# Altium PCB novena_battery_evt1a.PcbDoc (part 2 of 3)
Units mil, origin at the board's own origin, x right, y up, seen from the top; angles counter-clockwise.
Board outline 4763.78 x 1614.17 mil, 4 copper layers (Top Layer, Internal Plane 1, Internal Plane 2, Bottom Layer), stack 65.8 mil thick; 204 components, 130 nets, 1424 pads, 318 vias.
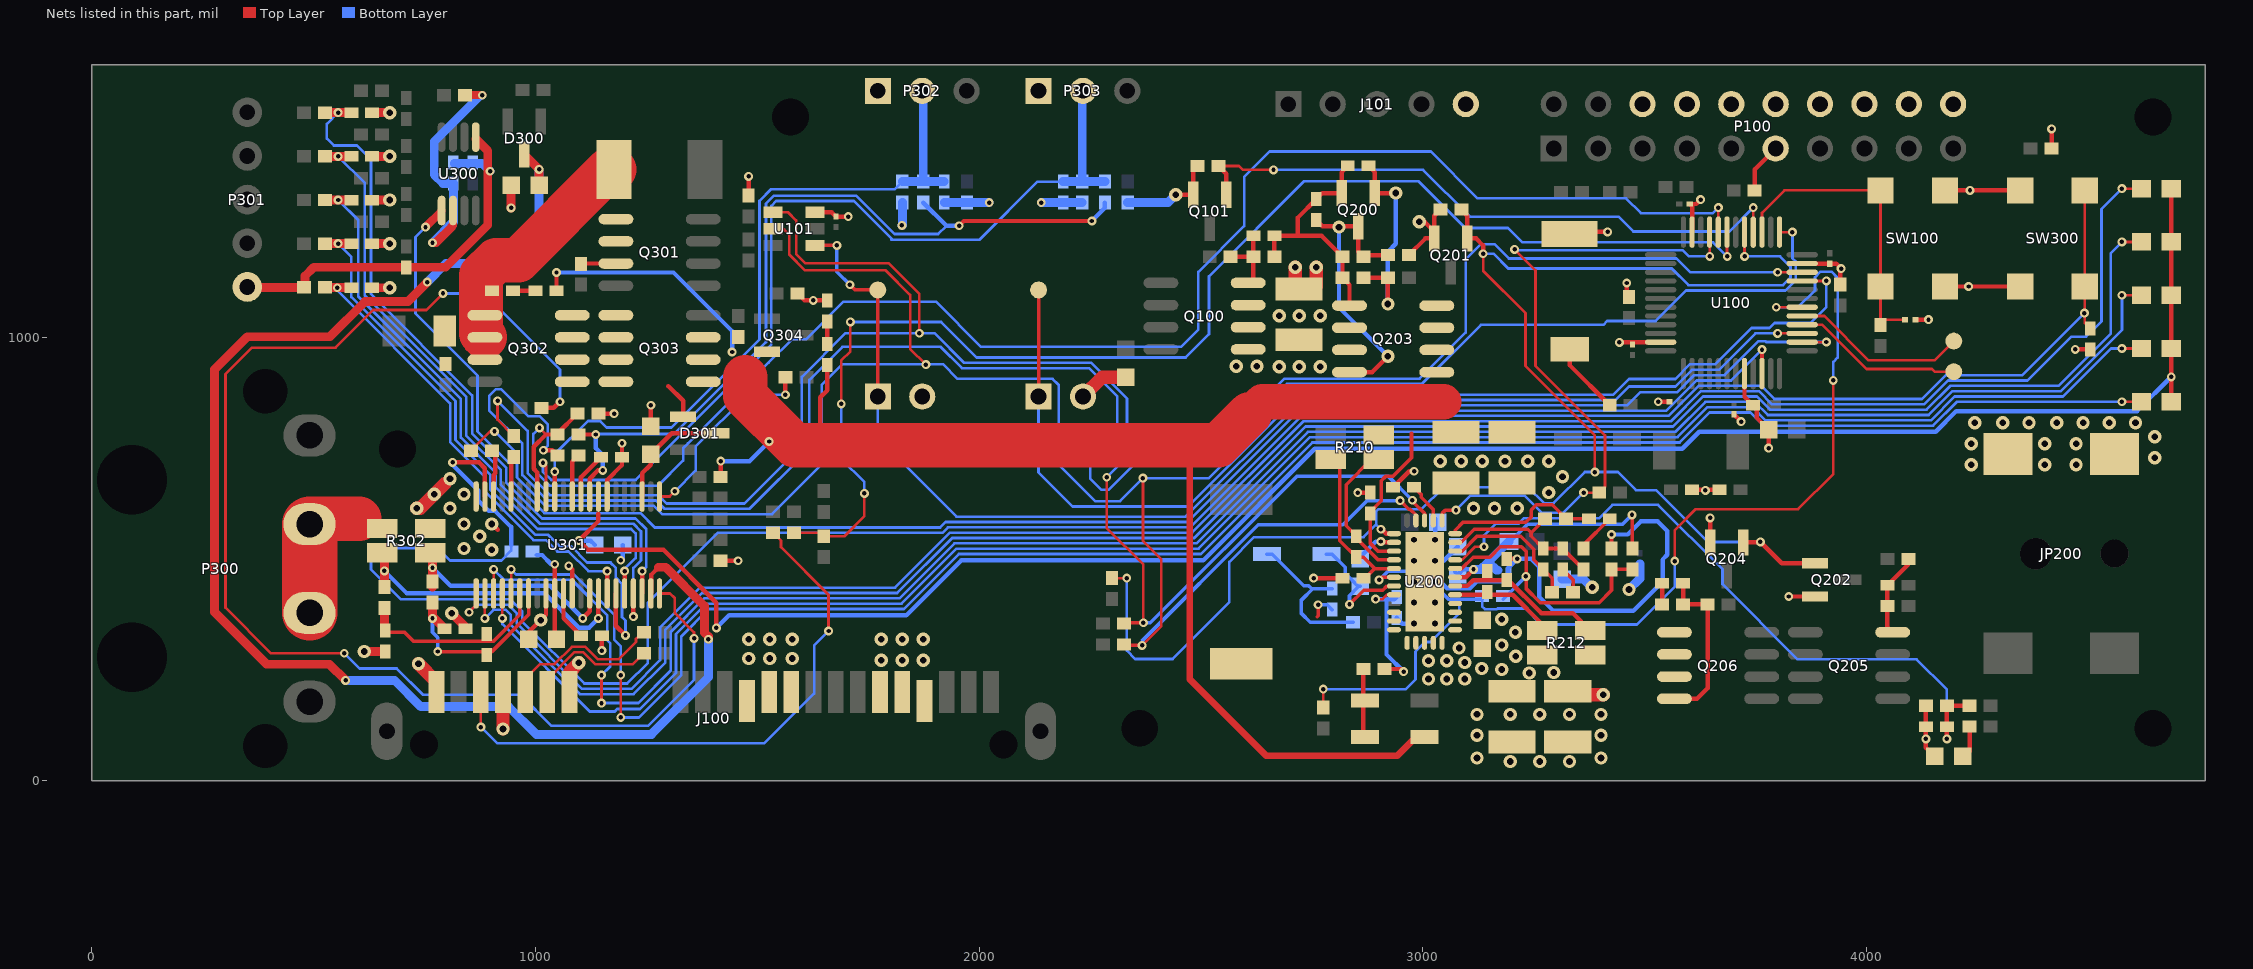
[diagram p4: the nets of this part, all layers, seen from the top]

## Via types
v1: diameter 20, hole 10, Top Layer to Bottom Layer, tented both sides, 179 vias
v2: diameter 30, hole 15, Top Layer to Bottom Layer, tented both sides, 129 vias
v3: diameter 25.98, hole 12.99, Top Layer to Bottom Layer, tented top, 10 vias

## Nets (pads, with @x,y where several pads share a name; then routed paths per layer and width w, separated by ;. In a path a pad name is that pad's centre, name@x,y a point inside that pad or via, vN(x,y) a via of type N, cw(c..) or ccw(c..) an arc to the next point about the centre after c; other vN are vias at no path point)
ADC_IN5: J103.1 P102.1 U100.15 | length 2326
  Top Layer w6: v1(3799.75,1008.41) U100.15@3854.98,1008.41
  Top Layer w8: P102.1@2133.86,866.14 J103.1@2133.86,1106.3
  Bottom Layer w6: P102.1@2133.86,866.14 2133.86,694.88 2210.63,618.11 2470.74,618.11 2711.05,858.42 3434.2,858.42 3464.57,888.78 3569.44,888.78 3606.84,926.18 3667.32,926.18 3749.55,1008.41 v1(3799.75,1008.41)
ADC_IN6: J104.1 U100.16 | length 385.7
  Top Layer w6: U100.16@3854.98,1028.09 3900.06,1028.09 4000,928.15 4147.64,928.15 4153.54,922.24 J104.1@4196.85,922.24
ADC_IN7: J105.1 U100.17 | length 401.2
  Top Layer w6: U100.17@3854.98,1047.78 3904.98,1047.78 4004.92,947.83 4153.54,947.83 J105.1@4196.85,991.14
ANA_METER: J102.1 P101.1 U100.14 U101.1 | length 2981.9
  Top Layer w6: U100.14@3854.98,988.72 v1@3909.32,988.72
  Top Layer w8: U101.1@1629.92,1206.69 v1(1679.13,1206.69) ; v1(1708.66,1118.11) 1720.47,1106.3 J102.1@1771.65,1106.3 P101.1@1771.65,866.14
  Bottom Layer w6: P101.1@1771.65,866.14 1771.65,772.64 1949.01,595.28 2464.89,595.28 2716.02,846.42 3460.59,846.42 3489.75,875.58 3573.21,875.58 3611.77,914.14 3679.91,914.14 3756.56,990.79 3772.3,990.79 3774.03,989.06 v1(3909.65,989.06)
  Bottom Layer w8: v1(1679.13,1206.69) 1679.13,1147.64 v1(1708.66,1118.11)
BAL_SGND: C309.2 C310.2 C311.2 P301.5 R317.1 U300.5 | length 906.7
  Top Layer w20: P301.5@350.39,1113.19 351.38,1112.2 R317.1@478.35,1112.2 480.32,1114.17 480.32,1137.8 500,1157.48 C311.2@708.66,1157.48 796.97,1157.48 892.3,1252.81 892.3,1419.87 U300.5@865.98,1446.19
  Bottom Layer w20: C310.2@816.93,1391.73 866.14,1391.73 879.92,1391.73 v1(897.64,1374.02)
BAT_PGND: P300.2 P300.3 R302.2 | length 316.9
  Top Layer w100: P300.2@490.55,578.35 502.76,590.55 602.36,590.55
  Top Layer w125: P300.3@490.55,378.35 P300.2@490.55,578.35
BAT_PROTECTED: C207.1 C208.1 C223.2 C301.1 C302.2 D200.1 Q203.5 Q203.6 Q203.7 Q203.8 Q303.1 Q303.2 Q303.3 Q304.2 R210.3 R304.2 R319.1 U200.20 | length 4101
  Top Layer w8: U200.20@2935.04,517.72 2898.87,517.72 2881.89,534.7 C223.2@2881.89,602.36 2881.89,606.3 2906.5,630.91 2906.5,676.54 2915.98,686.02 2932.45,686.02 2974.41,727.98 2974.41,783.46
  Top Layer w10: C301.1@1047.24,1104.33 v1(1047.24,1145.67) ; R319.1@1417.32,685.04 v1(1417.32,720.47) ; 1641.73,755.91 1641.73,864.17 1657.48,879.92 C302.2@1657.48,937.01
  Top Layer w15: 2487.2,755.91 2474.41,743.11 2474.41,229.33 2647.64,56.1 2941.93,56.1 2984.25,98.43 D200.1@3003.94,98.43
  Top Layer w80: 2610.24,826.77 2637.8,854.33 3047.24,854.33
  Top Layer w100: 1472.44,909.45 1472.44,867.29 1583.83,755.91 1641.73,755.91 2487.2,755.91 2539.37,755.91 2610.24,826.77
  Bottom Layer w10: v1(1047.24,1145.67) 1311.02,1145.67 1442.91,1013.78 v1(1442.91,966.54) ; v1(1417.32,720.47) 1482.28,720.47 v1(1526.57,764.76)
CHG_ACIN: C217.1 R214.2 R215.1 U200.9 | length 1604.2
  Top Layer w6: U200.9@3072.83,498.03 3088.58,498.03 3118.11,527.56 v1(3137.8,527.56)
  Top Layer w10: v1(4181.1,94.49) C217.1@4181.1,122.05 R215.1@4181.1,169.29 R214.2@4232.28,169.29
  Bottom Layer w6: v1(3137.8,527.56) 3137.8,553.15 3164.37,579.72 3215.55,579.72 3227.36,591.54 3396.65,591.54 3427.17,622.05 3530.51,622.05 3675.42,477.14 3675.42,443.14 3844.94,273.62 4113.19,273.62 4181.1,205.71 v1(4181.1,94.49)
CHG_ACOK: Q201.1 Q202.1 Q204.1 R203.2 R222.2 U100.29 U200.18 | length 3851.7
  Top Layer w6: R222.2@2299.21,456.69 v1(2332.68,456.69) ; v1(3135.83,1187.99) 3135.83,1149.61 3231.3,1054.13 3231.3,935.04 3387.8,778.54 v1(3387.8,695.87) ; v1@3725.06,1182.42 U100.29@3725.06,1236.76
  Top Layer w10: v1(2905.51,566.93) 2907.64,566.93 2917.49,557.09 U200.18@2935.04,557.09 ; R203.2@3086.61,1287.4 3100.39,1273.62 Q201.1@3100.39,1222.44 3120.08,1222.44 3135.83,1206.69 v1(3135.83,1187.99) ; Q204.1@3722.44,537.4 3761.81,537.4 3809.06,490.16 Q202.1@3883.86,490.16
  Bottom Layer w6: v1(2332.68,456.69) 2332.68,293.31 2351.38,274.61 2436.02,274.61 2563.98,402.56 2563.98,493.43 2619.76,549.21 2866.14,549.21 2894.69,577.76 ; v1(2905.51,566.93) 2894.69,577.76 ; v1(3135.83,1187.99) 3159.06,1187.99 3192.52,1154.53 3561.02,1154.53 3598.43,1117.13 3812.01,1117.13 3828.74,1133.86 3828.74,1158.46 3805.12,1182.09 v1(3725.39,1182.09) ; v1(3760.83,538.39) 3642.72,538.39 3525.89,655.22 3480.32,655.22 3439.67,695.87 v1(3387.8,695.87) 3365.16,695.87 3294.9,625.61 3273.02,625.61 3237.2,661.42 3046.26,661.42 2997.05,612.2 2899.61,612.2 2894.69,607.28 2894.69,577.76
CHG_ALERT: R326.2 U100.25 | length 4290.1
  Top Layer w6: U100.25@3803.8,1236.76 v1(3833.13,1236.76) v1@3833.66,1236.22
  Top Layer w10: v1(1017.72,745.08) 1037.4,745.08 R326.2@1049.21,733.27
  Bottom Layer w6: v1(1017.72,745.08) 1027.86,755.22 1027.86,803.15 1009.15,821.85 983.27,821.85 922.24,882.87 910.43,882.87 895.37,867.81 895.37,834.94 970.28,760.03 970.28,688.93 1027.32,631.89 1271.65,631.89 1290.4,613.14 1482.34,613.14 1617.13,747.92 1617.13,903.43 1691.85,978.16 1913.34,978.16 1961.34,930.16 2247.75,930.16 2311.02,866.89 2311.02,777.56 2250,716.54 2250,681.1 2275.22,655.88 2291.95,655.88 2353.77,717.71 2516.68,717.71 2693.39,894.42 2997.53,894.42 3130.86,1027.75 3406.69,1027.75 3415.35,1036.42 3524.75,1036.42 3593.45,1105.13 3816.98,1105.13 3840.74,1128.89 3840.74,1170.09 3833.13,1177.7 v1(3833.13,1236.76)
CHG_CE: R220.2 U100.33 U200.13 | length 1556.9
  Top Layer w6: v1(3206.69,1197.83) 3253.94,1150.59 3253.94,935.04 3410.43,778.54 3410.43,662.4 R220.2@3397.64,649.61 v1(3362.2,649.61) ; U100.33@3646.32,1236.76 3646.32,1182.42 v1(3646.65,1182.09)
  Top Layer w8: U200.13@3043.31,586.61 3043.31,602.36 3051.18,610.24 v1(3074.8,610.24)
  Bottom Layer w6: v1(3074.8,610.24) 3107.28,642.72 3229.33,642.72 3267.72,604.33 3316.93,604.33 v1(3362.2,649.61) ; v1@3209.65,1195.87 3585.63,1195.87 3599.41,1182.09 v1(3646.65,1182.09)
CHG_CRIT: U100.10 U300.1 | length 3805.9
  Top Layer w10: v1@3763.78,972.44 v1(3764.43,971.79) U100.10@3764.43,917.86
  Top Layer w18: v1(751.97,1248.03) 788.39,1284.45 U300.1@788.39,1285.43
  Bottom Layer w6: v1(751.97,1248.03) 729.33,1225.39 729.33,1053.15 869.15,913.33 869.15,787.59 945.87,710.87 945.87,677.17 1019.69,603.35 1236.22,603.35 1268.7,570.87 1911.92,570.87 1924.34,583.28 2469.86,583.28 2720.99,834.42 3549.02,834.42 3616.74,902.14 3694.78,902.14 v1(3764.43,971.79)
CHG_CSON: C212.1 R210.4 U200.21 | length 332.5
  Top Layer w8: R210.4@2900.59,724.41 2884.08,724.41 2826.99,667.32 2826.99,574.58 C212.1@2850.39,551.18 2850.39,546.4 2898.76,498.03 U200.21@2935.04,498.03
CHG_CSOP: C212.2 C218.2 R210.1 U200.22 | length 376
  Top Layer w8: R210.1@2792.32,724.41 2812.99,703.74 2812.99,541.34 C212.2@2850.39,503.94 2866.14,503.94 2891.73,478.35 ; C218.2@2866.14,452.76 2891.73,478.35 ; U200.22@2935.04,478.35 2891.73,478.35
CHG_CSSN: C216.2 R212.4 U200.5 | length 237.9
  Top Layer w10: U200.5@3072.83,419.29 3202.76,419.29 3268.7,353.35 R212.4@3268.7,338.58
CHG_CSSP: C216.1 C219.1 R212.1 U200.6 | length 356.5
  Top Layer w10: U200.6@3072.83,438.98 3100.39,438.98 3113.36,451.95 3192.73,451.95 3266.72,377.95 3337.6,377.95 R212.1@3376.97,338.58
CHG_EAI: C220.2 C221.2 R223.1 R224.1 U200.11 | length 389.9
  Top Layer w8: U200.11@3072.83,537.4 3080.71,537.4 3082.68,539.37 3084.65,539.37 3086.61,537.4 3116.14,566.93 3236.22,566.93 3244.09,559.06 ; R223.1@3275.59,590.55 3244.09,559.06 ; R224.1@3362.2,476.38 C220.2@3314.96,523.62 C221.2@3271.65,523.62 3244.09,551.18 3244.09,559.06
CHG_EAO: C221.1 R219.2 U200.10 | length 316.8
  Top Layer w8: U200.10@3072.83,517.72 3088.58,517.72 3122.05,551.18 3220.47,551.18 3249.84,521.81 3249.84,498.19 C221.1@3271.65,476.38 3291.34,456.69 R219.2@3291.34,425.2
CHG_FBO: C225.2 R223.2 U200.12 | length 355
  Top Layer w8: U200.12@3072.83,557.09 3072.83,564.96 3090.55,582.68 3232.28,582.68 3244.09,594.49 3244.09,610.24 3255.91,622.05 3291.34,622.05 R223.2@3322.83,590.55 C225.2@3374.02,590.55
CHG_ICOUT: R216.2 R218.2 U100.18 U200.23 | length 2548.1
  Top Layer w6: R216.2@2775.59,165.35 v1(2775.59,206.69) ; v1(3567.91,495.08) 3567.91,564.96 3615.16,612.2 3845.47,612.2 3925.2,691.93 v1(3925.2,902.56) v1@3924.21,903.54 ; v1@3796.26,1067.91 v1(3796.71,1067.46) U100.18@3854.98,1067.46
  Top Layer w8: v1(2901.57,452.76) 2907.48,458.66 U200.23@2935.04,458.66
  Bottom Layer w6: v1(2775.59,206.69) 2961.61,206.69 2983.27,228.35 2983.27,291.34 3004.92,312.99 3017.32,312.99 3081.69,377.36 3081.69,409.45 ; R218.2@3133.86,416.34 3133.86,409.45 3133.86,392.72 3139.76,386.81 3166.85,386.81 3168.21,388.17 3230.92,388.17 3266.73,352.36 3482.28,352.36 3567.91,437.99 v1(3567.91,495.08) ; v1(3796.71,1067.46) 3846.01,1067.46 3883.86,1105.32 3883.86,1134.84 3896.65,1147.64 3921.26,1147.64 3935.04,1133.86 3935.04,953.74 3925.2,943.9 v1(3925.2,902.56)
  Bottom Layer w8: v1(2901.57,452.76) 2920.63,471.81 2989.84,471.81 3003.31,458.34 3003.31,440.55 3018.04,425.83 3041.34,425.83 3057.72,409.45 3081.69,409.45 R218.2@3133.86,409.45
CHG_ICREF: R217.2 R218.1 R221.1 U200.8 | length 652.5
  Top Layer w8: U200.8@3072.83,478.35 3087.86,478.35 3113.45,503.94 3151.21,503.94 3174.83,527.56 3222.22,527.56 3232.59,517.19 3232.59,433.3 3264.47,401.42 3397.48,401.42 3425.2,429.13 R221.1@3425.2,476.38 R217.2@3472.44,476.38
  Bottom Layer w8: R218.1@3181.1,409.45 v1(3232.28,460.63)
CHG_MASTERPWR: Q101.1 R108.2 U100.28 | length 1416.3
  Top Layer w6: R108.2@2539.37,1385.83 2585.63,1385.83 2594.49,1376.97 v1(2663.39,1376.97) ; U100.28@3744.75,1236.76 v1(3744.75,1291.99)
  Top Layer w10: R108.2@2539.37,1385.83 2557.09,1368.11 Q101.1@2557.09,1320.87
  Bottom Layer w6: v1(2663.39,1376.97) 3000.87,1376.97 3106.19,1271.65 3440.83,1271.65 3474.3,1238.19 3690.95,1238.19 v1(3744.75,1291.99)
CHG_PWRSWITCH: C116.2 R119.1 SW100.1 SW100.2 U100.27 | length 694.6
  Top Layer w6: U100.27@3764.43,1236.76 3764.43,1280.18 3814.96,1330.71 SW100.1@4031.5,1330.71 SW100.2@4031.5,1114.17 R119.1@4031.5,1027.56 4043.31,1039.37 C116.2@4086.61,1039.37
CHG_SCL: R225.2 R329.2 U100.21 U101.5 U200.16 | length 5773.6
  Top Layer w6: R329.2@854.33,744.09 897.64,787.4 v1(907.48,787.4) ; U101.5@1535.43,1244.09 1533.46,1244.09 1532.48,1243.11 1560.04,1243.11 1571.85,1231.3 1571.85,1185.79 1607.05,1150.59 1789.37,1150.59 1844.49,1095.47 1844.49,973.43 v1(1879.92,937.99) ; v1(2367.13,305.12) 2410.43,348.43 2410.43,499.02 2369.09,540.35 v1(2369.09,682.09) ; U100.21@3854.98,1126.52 v1@3909.32,1126.52
  Top Layer w8: R225.2@2326.77,307.09 2328.74,305.12 v1(2367.13,305.12) ; v1@2948.82,633.86 v1(2948.82,631.64) 2968.09,612.36 2971.16,612.36 2984.25,599.27 U200.16@2984.25,586.61
  Bottom Layer w6: v1(907.48,787.4) 907.48,788.39 958.28,737.58 958.28,683.96 1022.35,619.89 1266.68,619.89 1285.43,601.14 1533.12,601.14 1644.89,712.91 1644.89,891.93 1691.93,938.98 1918.58,938.98 1951.4,906.16 2165.63,906.16 2179.13,892.65 2179.13,712.6 2261.32,630.41 2317.42,630.41 v1(2369.09,682.09) 2517.75,682.09 2706.08,870.42 3429.23,870.42 3464.57,905.75 3569.44,905.75 3602.66,938.98 3659.45,938.98 3741.14,1020.67 3781.5,1020.67 3792.82,1031.99 3873.52,1031.99 3909.65,1068.12 v1(3909.65,1126.85)
  Bottom Layer w8: v1@2367.13,302.17 v1(2367.13,305.12) 2367.13,314.96 2628.94,576.77 2819.88,576.77 2874.75,631.64 v1(2948.82,631.64)
CHG_SDA: R226.2 R327.2 U100.22 U101.4 U200.15 | length 5782.3
  Top Layer w6: v1(914.37,856.3) 914.37,813.98 R327.2@950.79,777.56 ; U101.4@1535.43,1281.5 1568.9,1281.5 1587.6,1262.8 1587.6,1187.01 1608.27,1166.34 1796.26,1166.34 1865.16,1097.44 v1(1865.16,1008.86) ; v1(2287.4,684.06) 2287.4,569.88 2370.08,487.2 v1(2370.08,356.3) ; v1(3799.75,1146.2) U100.22@3854.98,1146.2
  Top Layer w8: R226.2@2326.77,354.33 2328.74,356.3 v1(2370.08,356.3) ; v1(2976.38,632.36) 2976.38,629.92 3003.94,602.36 U200.15@3003.94,586.61
  Bottom Layer w6: v1(914.37,856.3) 982.28,788.39 982.28,693.9 1032.29,643.89 1276.62,643.89 1295.37,625.14 1470.61,625.14 1600.34,754.87 1600.34,910.38 1698.82,1008.86 1899.61,1008.86 1966.31,942.16 2252.72,942.16 2333.06,861.83 2333.06,729.71 ; v1(2287.4,684.06) 2333.06,729.71 ; v1(3799.75,1146.2) 3602.81,1146.2 3571.85,1177.17 3193.9,1177.17 3161.42,1209.65 3130.61,1209.65 3096.46,1175.49 3096.46,1010.32 2992.56,906.42 2688.42,906.42 2511.71,729.71 2333.06,729.71
  Bottom Layer w8: v1(2370.08,356.3) 2385.83,356.3 2715.55,686.02 2922.72,686.02 v1(2976.38,632.36)
CHG_SYS: C100.1 C200.2 C201.1 C202.1 C209.1 C210.1 C211.1 Q100.1 Q100.2 Q100.3 Q200.2 Q203.1 Q203.2 Q203.3 R104.2 R200.1 R204.1 R212.3 U200.2 U200.3 U200.4 | length 649.2
  Top Layer w10: R104.2@2665.35,1181.1 C100.1@2665.35,1228.35 2718.5,1228.35 ; C200.2@2830.71,1385.83 2816.93,1372.05 Q200.2@2816.93,1324.8 2773.62,1324.8 C202.1@2759.84,1311.02 2718.5,1269.69 2718.5,1228.35 ; Q203.1@2834.65,1071.06 2834.65,1118.11 R200.1@2818.9,1133.86 R204.1@2818.9,1181.1 2771.65,1228.35 2718.5,1228.35
  Top Layer w30: C210.1@3326.77,201.77 3334.65,193.9 v2(3406.5,193.9)
  other v2: 3240.16,243.11 3295.28,244.09 3178.15,250.98 3209.65,280.51 3178.15,306.1 3208.66,334.65 3178.15,364.17 2676.18,933.07 2721.46,933.07 2768.7,933.07 2579.72,934.06 2625.98,934.06 2676.18,1048.23 2721.46,1048.23 2768.7,1048.23
CHG_VREF: C105.1 C214.1 L100.1 R217.1 U200.7 | length 603.3
  Top Layer w8: R217.1@3472.44,523.62 3472.44,562.99 v1@3472.44,599.41
  Top Layer w10: U200.7@3072.83,458.66 3096.46,458.66 v1(3114.17,476.38)
  Bottom Layer w8: C214.1@3071.5,471.81 C214.1@3078.74,464.57 ; L100.1@3201.4,543.86 3235.29,577.76 3449.8,577.76 v1(3471.46,599.41)
  Bottom Layer w10: C214.1@3078.74,464.57 3090.55,476.38 v1(3114.17,476.38)
  Bottom Layer w20: v1(3114.17,476.38) 3130.91,476.38 3147.64,493.11 ; C105.1@3169.29,474.41 3166.34,474.41 3147.64,493.11 ; L100.1@3193.9,539.37 3147.64,493.11
GG_2.5V: C321.1 R334.2 U301.32 | length 219.8
  Top Layer w10: v1(1043.31,488.19) U301.32@1043.31,422.24 1043.31,322.83 C321.1@1047.24,318.9
  Bottom Layer w10: R334.2@1002.95,508.86 1014.76,508.86 1035.43,488.19 v1(1043.31,488.19)
GG_3.3V: C323.1 D302.1 D303.1 D304.1 D305.1 D306.1 U301.8 | length 4539.1
  Top Layer w10: 1141.73,602.36 1141.73,585.63 v1(1097.44,541.34) 1118.11,520.67 1288.39,520.67 1407.55,401.51 v1(1407.55,344.51) ; D302.1@4687.01,854.33 D303.1@4687.01,974.41 D304.1@4687.01,1094.49 D305.1@4687.01,1214.57 D306.1@4687.01,1334.65
  Bottom Layer w10: v1(1097.44,541.34) 1124.02,541.34 C323.1@1133.86,531.5 ; v1(1407.55,344.51) 1436.27,373.23 1835.91,373.23 1959.96,497.28 2505.48,497.28 2756.61,748.42 3584.64,748.42 3622.83,786.61 4155.79,786.61 4202.51,833.33 4609.91,833.33 v1(4687.01,910.43)
GG_ALERT: R326.1 U301.11 | length 98.2
  Top Layer w10: U301.11@1082.68,640.75 1082.68,719.49 R326.1@1096.46,733.27
GG_ASRN: R302.4 R325.2 U301.36 | length 527.3
  Top Layer w10: v1(1106.3,366.14) 1122.05,381.89 U301.36@1122.05,422.24
  Top Layer w20: R302.4@762.8,513.78 767.72,508.86 R325.2@767.72,448.82 R325.2@767.72,437.01
  Bottom Layer w10: v1(767.72,480.32) 808.89,439.14 1033.3,439.14 v1(1106.3,366.14)
GG_ASRP: R302.1 R328.2 U301.37 | length 678.8
  Top Layer w10: v1(1141.73,366.14) U301.37@1141.73,422.24
  Top Layer w20: R302.1@654.53,513.78 659.45,508.86 v1(659.45,472.93) R328.2@659.45,437.01
  Bottom Layer w10: v1(659.45,472.93) 709.24,423.14 1019.6,423.14 1097.6,345.14 1120.73,345.14 v1(1141.73,366.14)
GG_CHG: R307.2 U301.44 | length 2997.9
  Top Layer w6: v1(568.9,287.4) 403.89,287.4 301.18,390.11 301.18,916.97 360.59,976.38 549.21,976.38 634.06,1061.22 754.13,1061.22 v1(791.34,1098.43) ; U301.44@1279.53,422.24 1303.15,422.24 1313.98,411.42 1313.98,377.95 1357.28,334.65 v1(1357.28,320.87)
  Top Layer w10: R307.2@1013.78,840.55 1041.34,840.55 v1(1055.12,854.33)
  Bottom Layer w6: v1(568.9,287.4) 603.35,252.95 687.01,252.95 746.06,193.9 965.55,193.9 1035.73,123.72 1253.34,123.72 1357.28,227.66 v1(1357.28,320.87) ; v1@790.35,1098.43 v1(791.34,1098.43) 883.86,1098.43 1055.12,927.17 v1(1055.12,854.33)
GG_DISP: C326.1 R334.1 SW300.3 SW300.4 U301.21 | length 5524.7
  Top Layer w6: SW300.3@4492.13,1330.71 SW300.4@4492.13,1114.17 4492.13,1031.5 C326.1@4503.94,1019.69
  Top Layer w10: v1(813.03,717.55) 873,717.55 885.83,704.72 U301.21@885.83,640.75
  Bottom Layer w6: 944.88,531.5 944.88,518.7 922.85,496.67 807.46,496.67 779.53,524.61 648.62,524.61 629.13,505.12 629.13,476.38 696.37,409.14 943.01,409.14 969.78,382.37 969.78,359.54 1110.13,219.19 1206.39,219.19 1252.95,265.75 1252.95,401.39 1410.43,558.87 1916.9,558.87 1929.31,571.28 2474.83,571.28 2725.96,822.42 3553.99,822.42 3621.71,890.14 3762.89,890.14 3792.42,860.61 4125.14,860.61 4178.86,914.33 4351.34,914.33 v1(4491.14,1054.13)
  Bottom Layer w10: v1(813.03,717.55) 813.03,712.56 871.06,654.53 871.06,631.89 894.69,608.27 908.82,608.27 944.88,572.2 944.88,531.5
GG_DSG: R308.2 U301.1 | length 449.5
  Top Layer w6: U301.1@1279.53,640.75 1302.17,640.75 v1(1313.98,652.56)
  Top Layer w10: v1(1562.99,870.08) R308.2@1562.99,909.45
  Bottom Layer w6: v1(1313.98,652.56) 1360.73,699.31 1360.73,753.44 1477.36,870.08 v1(1562.99,870.08)
GG_GSRN: C317.1 C318.1 R325.1 U301.29 | length 441.4
  Top Layer w8: v1(779.53,291.34) 901.69,291.34 984.25,373.9 U301.29@984.25,422.24
  Top Layer w20: v1(767.72,366.14) v1@771.65,366.14 ; R325.1@767.72,401.57 767.72,370.08 v1@771.65,366.14 ; C318.1@795.28,342.52 v1@771.65,366.14
  Bottom Layer w8: v1(767.72,366.14) 767.72,334.65 779.53,322.83 v1(779.53,291.34)
GG_GSRP: C317.2 C319.1 R328.1 U301.28 | length 441.1
  Top Layer w8: C319.1@659.45,334.65 704.72,334.65 724.41,314.96 905.51,314.96 964.57,374.02 U301.28@964.57,422.24
  Top Layer w20: C319.1@659.45,334.65 R328.1@659.45,389.76
GG_P1: C312.1 R313.2 U301.42 | length 1601.5
  Top Layer w10: U301.42@1240.16,422.24 v1(1240.16,472.44)
  Top Layer w20: R313.2@525.59,1505.91 v1(555.12,1505.91) C312.1@576.77,1505.91
  Bottom Layer w6: v1(555.12,1505.91) 529.53,1480.32 529.53,1447.83 545.28,1432.09 597.44,1432.09 628.94,1400.59 628.94,1097.17 857.15,868.96 857.15,782.61 933.87,705.9 933.87,672.19 1014.71,591.35 1225.37,591.35 1249.54,567.18 1249.54,481.82 v1(1240.16,472.44)
GG_P2: C315.1 R314.2 U301.41 | length 1553.9
  Top Layer w10: v1(1220.47,370.08) U301.41@1220.47,422.24
  Top Layer w20: R314.2@525.59,1407.48 v1(555.12,1407.48) C315.1@576.77,1407.48
  Bottom Layer w6: v1(555.12,1407.48) 615.16,1347.44 615.16,1093.98 843.46,865.68 843.46,778.59 921.87,700.18 921.87,667.22 1009.74,579.35 1220.4,579.35 1237.54,562.21 1237.54,496.69 1220.47,479.63 v1(1220.47,370.08)
GG_P3: C313.1 R315.2 U301.40 | length 1349.6
  Top Layer w10: U301.40@1200.79,422.24 v1(1200.79,472.44)
  Top Layer w20: R315.2@525.59,1309.06 v1(555.12,1309.06) C313.1@576.77,1309.06
  Bottom Layer w6: v1(555.12,1309.06) 600.39,1263.78 600.39,1091.77 831.46,860.71 831.46,773.39 909.87,694.98 909.87,661.75 1004.27,567.35 1215.43,567.35 1225.54,557.24 1225.54,501.66 1200.79,476.91 v1(1200.79,472.44)
GG_P4: C316.1 R316.2 U301.39 | length 1368.3
  Top Layer w10: U301.39@1181.1,422.24 1181.1,349.41 v1(1202.76,327.76)
  Top Layer w20: R316.2@525.59,1210.63 v1(555.12,1210.63) C316.1@576.77,1210.63
  Bottom Layer w6: v1(555.12,1210.63) 584.65,1181.1 584.65,1090.55 819.46,855.74 819.46,768.42 897.87,690.01 897.87,656.78 1000.38,554.26 1028.65,554.26 1054.18,528.73 1079.77,528.73 1116.38,492.13 1169.29,492.13 1169.29,491.44 1181.1,479.63 1181.1,457.68 1194.73,444.05 1194.73,368.95 1202.76,360.93 v1(1202.76,327.76)
GG_P5: C314.1 R317.2 U301.38 | length 1048.5
  Top Layer w10: U301.38@1161.42,422.24 v1(1161.42,472.44)
  Top Layer w20: R317.2@525.59,1112.2 C314.1@576.77,1112.2
  Bottom Layer w6: v1(553.15,1111.22) 553.15,1105.08 807.46,850.77 807.46,763.45 885.87,685.04 885.87,651.8 995.41,542.26 1023.68,542.26 1049.21,516.73 1074.8,516.73 1119.09,472.44 v1(1161.42,472.44)
GG_SMBC: R329.1 U301.20 | length 108.2
  Top Layer w10: R329.1@901.57,744.09 909.45,736.22 909.45,692.91 905.51,688.98 U301.20@905.51,640.75
GG_SMBD: R327.1 U301.18 | length 95.5
  Top Layer w10: U301.18@944.88,640.75 R327.1@944.88,736.22
GG_SYSPRES: R324.2 R330.1 U100.32 U301.15 | length 3725
  Top Layer w6: v1(1008.86,795.28) 1008.86,795.1 1023.45,780.51 ; U100.32@3666.01,1236.76 v1(3666.01,1291.99) v1@3666.34,1292.32
  Top Layer w10: U301.15@1003.94,640.75 1003.94,694.88 995.78,703.04 995.78,752.84 1023.45,780.51 R324.2@1049.21,780.51 1049.21,782.48 R330.1@1094.49,827.76
  Bottom Layer w6: v1(1008.86,795.28) 995.08,781.5 995.08,701.24 1030.96,665.35 1276.57,665.35 1332.68,721.46 1332.68,749.55 1343.24,760.11 1525.42,942.29 1578.2,995.08 1609.49,995.08 1694.32,1079.91 1902.37,1079.91 2004.13,978.16 2455.28,978.16 2493.91,1016.78 2493.91,1146.94 2597.25,1250.29 2597.25,1361.27 2654.29,1418.31 3018,1418.31 3123.31,1312.99 3457.96,1312.99 3491.42,1279.53 3653.54,1279.53 v1(3666.01,1291.99)
GG_TOUT: R324.1 R331.2 R332.2 U301.9 | length 1903.3
  Top Layer w10: R324.1@1096.46,780.51 v1(1135.83,780.51) ; U301.9@1122.05,640.75 1122.05,681.1 1140.75,699.8 v1(1151.57,699.8) ; v1(1954.72,1250.98) 1965.55,1261.81 v1(2253.94,1261.81)
  Bottom Layer w6: v1@1135.83,781.5 1312.22,781.5 1519.5,988.77 1519.5,1300.99 1537.4,1318.9 1722.44,1318.9 1809.06,1232.28 1907.48,1232.28 1926.18,1250.98
  Bottom Layer w10: v1(1135.83,780.51) 1135.83,750 1151.57,734.25 v1(1151.57,699.8) ; R331.2@1874.02,1303.15 1926.18,1250.98 v1(1954.72,1250.98) ; v1(2253.94,1261.81) 2283.46,1291.34 R332.2@2283.46,1303.15
GG_TS1: C325.1 P302.2 R331.1 R335.2 U301.13 | length 1628.7
  Top Layer w10: U301.13@1043.31,640.75 v1(1043.31,696.85)
  Bottom Layer w6: v1(1043.31,696.85) 1043.31,736.22 1118.11,811.02 1145.67,811.02 1160.43,796.26 1171.26,796.26 1306.1,796.26 1504.73,994.89 1504.73,1307.11 1531.29,1333.66 1810.04,1333.66 R335.2@1826.77,1350.39
  Bottom Layer w20: R335.2@1826.77,1350.39 R331.1@1874.02,1350.39 ; P302.2@1871.65,1555.12 1874.02,1552.76 R331.1@1874.02,1350.39 ; C325.1@1921.26,1350.39 R331.1@1874.02,1350.39
GG_TS2: C324.1 P303.2 R332.1 R333.2 U301.14 | length 2114
  Top Layer w6: v1(1016.78,716.57) 1023.62,709.73 U301.14@1023.62,640.75
  Bottom Layer w6: v1(1016.78,716.57) 1016.78,696.51 1035.44,677.85 1225.54,677.85 1325.52,777.83 1531.5,983.8 1531.5,1296.02 1542.37,1306.9 1717.47,1306.9 1802.17,1222.2 1802.17,1219.49 2000.98,1219.49 2131.89,1350.39 C324.1@2188.98,1350.39
  Bottom Layer w20: C324.1@2188.98,1350.39 R332.1@2283.46,1350.39 ; R333.2@2232.28,1350.39 2232.28,1553.54 P303.2@2233.86,1555.12
GG_VCC: C307.1 D301.3 U301.3 | length 270.8
  Top Layer w10: U301.3@1240.16,640.75 1240.16,692.91 1259.84,712.6 C307.1@1259.84,736.22 1307.09,783.46 D301.3@1407.48,783.46
GND: C101.2 C102.2 C103.2 C104.2 C105.2 C106.2 C107.2 C108.2 C109.2 C110.2 C111.2 C112.1 C113.1 C114.2 C115.2 C116.1 C201.2 C203.2 C207.2 C208.2 C209.2 C210.2 C211.2 C213.2 C214.2 C215.2 C217.2 C218.1 C219.2 C222.2 C223.1 C224.2 C303.2 C305.1 C307.2 C312.2 C313.2 C314.2 C315.2 C316.2 C318.2 C319.2 C320.2 C321.2 C322.2 C323.2 C324.2 C325.2 C326.2 J100.4 J100.5 J100.6 J100.10 J100.11 J100.12 J100.16 J100.19 J100.22 J101.5 JP200.2 JP200.3 P100.6 P100.8 P100.10 P100.11 P100.12 P100.14 P100.16 P100.18 P100.20 P101.2 P102.2 P302.1 P303.1 Q101.2 Q201.2 Q202.2 Q204.2 R106.1 R108.1 R114.1 R115.1 R116.1 R118.2 R202.2 R203.1 R215.2 R221.2 R302.3 R311.2 R323.2 R330.2 R333.1 R335.1 R336.1 R337.1 SW100.3 SW100.4 SW300.1 SW300.2 U100.8 U100.23 U100.35 U100.47 U101.3 U200.1 U200.19 U200.32 U200.33 U200.34 U200.35 U301.7 U301.22 U301.31 U301.34 | length 5385.5
  Top Layer w10: v2(901.57,578.74) 914.7,565.61 ; C321.2@984.25,318.9 984.25,334.65 1023.62,374.02 U301.31@1023.62,422.24 ; v1(1074.8,484.25) 1082.68,476.38 U301.34@1082.68,422.24 ; R330.2@1141.73,827.76 v1(1177.17,827.76) ; v1(1149.61,293.31) C322.2@1149.61,326.77 ; U301.7@1161.42,640.75 1161.42,678.15 1194.88,711.61 C320.2@1194.88,729.33 v1(1194.88,760.83) ; C307.2@1259.84,799.21 v1(1259.84,846.46) ; R323.2@1417.32,496.06 v1(1456.69,496.06) ; R118.2@1480.31,1318.9 v1(1480.31,1362.2) ; R311.2@1590.55,1098.43 1606.3,1082.68 C305.1@1657.48,1082.68 ; U101.3@1629.92,1281.5 1667.32,1281.5 C115.2@1677.17,1271.65 v1(1704.72,1271.65) ; v2@2440.94,1322.83 v2(2442.91,1320.87) Q101.2@2482.28,1320.87 2482.28,1375.98 R108.1@2492.13,1385.83 ; v1(2753.94,456.69) C218.1@2818.9,456.69 ; v1(2853.35,649.61) C223.1@2881.89,649.61 ; v1(2905.51,539.37) 2907.47,537.4 U200.19@2935.04,537.4 ; C224.2@2933.07,661.42 2969.49,697.83 v1(2980.32,697.83) ; R202.2@2968.5,1185.04 3005.91,1222.44 Q201.2@3025.59,1222.44 ; v2(2992.13,1259.84) 3003.94,1259.84 3019.69,1244.09 3019.69,1228.35 Q201.2@3025.59,1222.44 ; R203.1@3039.37,1287.4 3025.59,1273.62 Q201.2@3025.59,1222.44 ; C219.2@3188.98,500 v1(3212.59,500) ; C108.2@3330.71,1232.28 3335.63,1237.2 v1(3416.34,1237.2) ; R221.2@3425.2,523.62 v1(3425.2,555.12) ; v1(3442.91,988.19) 3443.45,988.72 U100.47@3536.08,988.72 ; v1(3459.65,1122.05) 3459.65,1095.47 R106.1@3464.57,1090.55 ; v1@3530.51,854.33 3530.78,854.6 C109.2@3555.66,854.6 ; U100.35@3606.95,1236.76 3606.95,1294.62 C103.2@3601.56,1300.02 3615.96,1300.02 v1(3625.98,1310.04) ; C110.2@3610.7,655.59 C111.2@3663.68,655.59 ; Q204.2@3647.64,537.4 v1(3647.64,592.52) v1@3648.62,593.5 ; C114.2@3701.1,826.08 v1(3717.52,809.66) v1@3717.52,809.06 ; U100.8@3725.06,917.86 3725.06,865.49 C112.1@3744.09,846.46 3752.95,837.6 3752.95,817.91 C113.1@3779.53,791.34 v1(3779.53,750) ; R114.1@3748.03,1330.71 3748.03,1377.95 P100.11@3795.28,1425.2 ; v1(3824.8,415.35) Q202.2@3883.86,415.35 ; U100.23@3854.98,1165.89 3931.55,1165.89 v1(3942.91,1154.53) 3940.95,1152.56 R116.1@3940.95,1118.11 ; C116.1@4110.24,1039.37 v1(4139.76,1039.37) ; R215.2@4133.86,169.29 4133.86,74.8 C213.2@4153.54,55.12 ; SW100.4@4177.17,1114.17 v1(4230.31,1114.17) ; SW100.3@4177.17,1330.71 v1(4233.27,1330.71) SW300.1@4346.46,1330.71 ; v1@4231.3,1113.19 v1(4230.31,1114.17) ; SW300.2@4346.46,1114.17 v1(4230.31,1114.17) ; R115.1@4417.32,1425.2 v1(4417.32,1469.49) ; v1(4470.47,972.44) C326.2@4503.94,972.44
  Top Layer w20: v2(614.17,291.34) C319.2@649.61,291.34 ; C314.2@631.89,1111.22 v2(671.26,1111.22) ; C316.2@631.89,1210.63 v2(671.26,1210.63) ; C313.2@631.89,1309.06 v2(671.26,1309.06) ; C315.2@631.89,1407.48 v2(671.26,1407.48) ; C312.2@631.89,1505.91 v2(671.26,1505.91) ; v2(811.02,377.95) 842.52,346.46 C318.2@842.52,342.52 ; v1(944.88,1291.34) C303.2@944.88,1342.52
  Top Layer w30: v2(732.28,614.17) 740.16,614.17 v2(771.65,645.67) 795.28,669.29 ; v2(736.22,263.78) 776.57,223.43 J100.22@776.57,199.8 ; v2(926.57,116.73) J100.19@926.57,199.8 ; J100.16@1076.57,199.8 1076.57,244.84 v2(1097.49,265.76) ; P102.2@2233.86,866.14 2277.17,909.45 C101.2@2330.71,909.45 ; v2(2712.6,1157.48) 2712.6,1116.14 C201.2@2720.47,1108.27 2753.94,1108.27 2759.84,1114.17 v2(2759.84,1157.48)
  Bottom Layer w10: v1(1191.93,497.05) 1196.85,501.97 C323.2@1196.85,531.5 ; C215.2@2854.33,500 2893.7,539.37 v1(2905.51,539.37) ; C203.2@2940.94,367.13 2953.74,354.33 v3(2980.31,354.33) ; v3(3027.56,448.82) 3039.56,448.82 3054.5,433.88 3106.32,433.88 3122.24,449.8 3182.09,449.8 3192.91,460.63 C105.2@3192.91,474.41 3192.91,480.32 v1(3212.59,500) 3244.1,500 3262.8,481.3 3262.8,414.37 3294.29,382.87 3474.41,382.87 3540.35,448.82 3540.35,498.66 3551.18,509.49 3551.18,562.99 3529.12,585.06 3491.55,585.06 3461.61,555.12 v1(3425.2,555.12) ; v3(3027.56,496.06) 3047.24,496.06 C214.2@3078.74,527.56 ; v3(3027.56,543.31) C222.2@3027.56,590.55
  Bottom Layer w20: v1(1825.79,1251.97) 1826.77,1252.95 R335.1@1826.77,1303.15 ; C325.2@1921.26,1303.15 R336.1@1972.44,1303.15 v1(2022.64,1303.15) ; v1(2139.76,1303.15) C324.2@2188.98,1303.15 R333.1@2232.28,1303.15 ; R337.1@2334.65,1303.15 2425.2,1303.15 v2(2442.91,1320.87) ; C106.2@3313.98,454.72 3362.2,454.72 3380.91,436.02 v2(3381.89,436.02) ; v2(3464.57,431.1) 3489.17,455.71 C107.2@3489.17,489.17
  other v1: 4133.86,94.49 3636.81,654.53 3530.64,854.46 1625.98,1082.68
  other v2: 3196.85,43.31 3263.78,43.31 3330.71,43.31 3122.05,51.18 3401.57,51.18 3122.05,102.36 3401.57,102.36 3122.05,149.61 3196.85,149.61 3263.78,149.61 3330.71,149.61 3401.57,149.61 3012.8,229.33 3054.13,229.33 3094.49,229.33 3132.87,252.95 3094.49,266.73 3012.8,270.67 3054.13,270.67 1779.53,271.65 1826.77,271.65 1874.02,271.65 1480.32,275.59 1527.56,275.59 1578.74,275.59 3081.69,299.21 1480.32,318.9 1527.56,318.9 1578.74,318.9 1779.53,318.9 1826.77,318.9 1874.02,318.9 1011.81,362.2 901.57,520.67 838.58,523.62 874.02,551.18 838.58,578.74 807.09,614.17 3114.17,614.17 3161.42,614.17 3212.6,614.17 838.58,645.67 3283.46,649.61 807.09,681.1 3314.96,685.04 4236.22,712.6 4401.57,712.6 4472.44,712.6 3039.37,720.47 3086.61,720.47 3133.86,720.47 3185.04,720.47 3236.22,720.47 3283.46,720.47 4649.61,728.35 4236.22,759.84 4401.57,759.84 4472.44,759.84 4649.61,775.59 4244.09,807.09 4307.09,807.09 4366.14,807.09 4429.13,807.09 4488.19,807.09 4547.24,807.09 4606.3,807.09
  other v3: 3027.56,354.33 2980.31,401.57 3027.56,401.57 2980.32,448.82 2980.31,496.06 2980.31,543.31
HOST_TO_PM_UART: R101.1 R109.1 U100.31 | length 3023.5
  Top Layer w6: R101.1@1582.68,559.06 1641.73,559.06 R109.1@1649.61,551.18 1695.87,551.18 1741.14,596.46 v1(1741.14,647.64) ; v1(1688.98,849.41) 1688.98,946.85 1709.65,967.52 v1(1709.65,1034.45) ; v1@3685.69,1182.42 U100.31@3685.69,1236.76
  Bottom Layer w6: v1(1688.98,849.41) 1688.98,725.39 1741.14,673.23 v1(1741.14,647.64) ; v1(1709.65,1034.45) 1709.94,1034.15 1914.19,1034.15 1994.18,954.16 2465.22,954.16 2517.91,1006.84 2517.91,1137 2732.28,1351.38 2990.27,1351.38 3095.59,1246.06 3191.93,1246.06 3224.41,1213.58 3654.53,1213.58 v1(3686.02,1182.09)
LED1: D306.2 U301.23 | length 4602
  Top Layer w6: v1(850.39,379.92) 866.14,395.67 U301.23@866.14,422.24 ; v1@4574.8,1335.63 v1(4575.79,1334.65) D306.2@4620.08,1334.65
  Bottom Layer w6: v1(850.39,379.92) 867.61,397.14 938.04,397.14 957.68,377.5 957.68,354.67 1105.15,207.19 1216.05,207.19 1280.74,271.88 1280.74,345.7 1370.27,435.23 1443.4,435.23 1810.23,435.23 1934.28,559.28 2479.8,559.28 2730.93,810.42 3558.96,810.42 3626.68,878.14 3757.92,878.14 3787.45,848.61 4130.11,848.61 4183.83,902.33 4362.96,902.33 4461.61,1000.98 4495.08,1000.98 4529.53,1035.43 4529.53,1288.39 v1(4575.79,1334.65)
LED2: D305.2 U301.24 | length 4486.6
  Top Layer w6: v1(885.83,366.14) U301.24@885.83,422.24 ; v1(4575.79,1214.57) D305.2@4620.08,1214.57
  Bottom Layer w6: v1(885.83,366.14) 904.83,385.14 933.07,385.14 944.2,374.01 944.2,351.18 1100.18,195.19 1221.02,195.19 1292.74,266.91 1292.74,340.73 1375.24,423.23 1438.43,423.23 1815.2,423.23 1939.25,547.28 2484.77,547.28 2735.9,798.42 3563.93,798.42 3631.65,866.14 3752.95,866.14 3782.48,836.61 4135.08,836.61 4188.8,890.33 4433.16,890.33 4550.2,1007.37 4550.2,1188.98 v1(4575.79,1214.57)
LED3: D304.2 U301.25 | length 4536
  Top Layer w6: U301.25@905.51,422.24 v1(905.51,476.38) ; v1(1148.62,238.19) v1(1148.68,175.21) v1(1148.68,175.21) ; v1(4575.79,1094.49) D304.2@4620.08,1094.49
  Bottom Layer w6: v1(905.51,476.38) 928.75,453.14 1081.6,453.14 1161.42,373.33 1161.42,316.93 1168.61,309.74 1168.61,258.17 v1(1148.62,238.19) ; v1(1148.68,175.21) 1231.74,175.21 1304.74,248.21 1304.74,335.76 1380.21,411.23 1433.46,411.23 1820.17,411.23 1944.22,535.28 2489.74,535.28 2740.87,786.42 3568.9,786.42 3636.62,854.14 3747.98,854.14 3777.51,824.61 4140.05,824.61 4193.77,878.33 4438.13,878.33 4575.79,1015.99 v1(4575.79,1094.49)
LED4: D303.2 U301.26 | length 4260.2
  Top Layer w6: v1(925.2,366.14) U301.26@925.2,422.24 ; v1(4575.79,974.41) D303.2@4620.08,974.41
  Bottom Layer w6: v1(925.2,366.14) 925.2,353.21 1122.2,156.21 1178.55,156.21 1184.06,161.72 1235.22,161.72 1316.74,243.24 1316.74,330.79 1385.18,399.23 1825.14,399.23 1949.2,523.28 2494.71,523.28 2745.84,774.42 3573.87,774.42 3641.59,842.14 3743.01,842.14 3772.54,812.61 4145.02,812.61 4198.74,866.33 4443.1,866.33 4551.18,974.41 v1(4575.79,974.41)
LED5: D302.2 U301.27 | length 4365.2
  Top Layer w6: U301.27@944.88,422.24 v1(944.88,476.38) ; v1(1191.93,142.72) v1(1191.93,238.19) ; v1(4575.79,854.33) D302.2@4620.08,854.33
  Bottom Layer w6: v1(944.88,476.38) 956.12,465.14 1086.57,465.14 1177.09,374.62 1177.09,318.23 1191.93,303.39 v1(1191.93,238.19) ; v1(1191.93,142.72) 1233.19,142.72 1328.74,238.27 1328.74,325.79 1390.18,387.23 1830.11,387.23 1954.17,511.28 2499.68,511.28 2750.81,762.42 3578.84,762.42 3646.56,830.14 3738.04,830.14 3767.57,800.61 4149.99,800.61 4203.71,854.33 v1(4575.79,854.33)
NetC100_2: C100.2 Q100.4 R104.1 R105.2 | length 162.2
  Top Layer w10: R105.2@2566.93,1181.1 R104.1@2618.11,1181.1 ; Q100.4@2606.3,1122.24 2618.11,1134.06 R104.1@2618.11,1181.1 ; C100.2@2618.11,1228.35 R104.1@2618.11,1181.1
NetC108_1: C108.1 R107.1 | length 163.5
  Top Layer w10: C108.1@3330.71,972.44 3330.71,937.01 R107.1@3421.26,846.46
NetC200_1: C200.1 Q200.1 R200.2 R201.1 | length 488.3
  Top Layer w10: R200.2@2866.14,1133.86 R201.1@2921.26,1133.86 v2(2921.26,1074.8) ; C200.1@2877.95,1385.83 2891.73,1372.05 Q200.1@2891.73,1324.8 v2(2938.98,1324.8) v2@2940.94,1322.83
  Bottom Layer w10: v2(2921.26,1074.8) 2921.26,1192.91 2938.98,1210.63 v2(2938.98,1324.8)
NetC202_2: C202.2 Q200.3 Q203.4 R202.1 R204.2 | length 669.1
  Top Layer w10: C202.2@2759.84,1263.78 2773.62,1250 Q200.3@2854.33,1250 2854.33,1192.91 R204.2@2866.14,1181.1 2870.08,1185.04 R202.1@2921.26,1185.04 ; Q203.4@2834.65,921.06 2885.63,921.06 v2(2921.26,956.69)
  Bottom Layer w10: v2(2811.02,1248.03) 2811.02,1066.93 v2(2921.26,956.69)
NetC203_1: C203.1 R207.2 U200.25 | length 320.6
  Top Layer w6: v1(2893.7,409.45) 2909.45,409.45 2919.29,419.29 U200.25@2935.04,419.29
  Top Layer w10: R207.2@2913.39,251.97 2950.79,251.97 v1(2956.69,246.06)
  Bottom Layer w10: v1(2893.7,409.45) 2916.34,409.45 ; C203.1@2940.94,414.37 2936.02,409.45 2916.34,409.45 ; v1(2956.69,246.06) 2918.13,284.62 2918.13,407.65 2916.34,409.45
NetC204_1: C204.1 Q205.4 R205.1 R208.2 | length 189.6
  Top Layer w10: Q205.4@4059.06,334.84 4047.24,346.65 C204.1@4047.24,440.94 4094.49,488.19 R205.1@4094.49,500
NetC205_1: C205.1 Q206.4 R206.2 R209.2 | length 376
  Top Layer w10: Q206.4@3566.93,184.84 3617.91,184.84 3641.73,208.66 R206.2@3641.73,397.64 R209.2@3586.61,397.64 C205.1@3586.61,444.88
NetC205_2: C205.2 Q206.1 Q206.2 Q206.3 R209.1 R212.2 | length 47.2
  Top Layer w10: R209.1@3539.37,397.64 C205.2@3539.37,444.88
NetC206_1: C206.1 D202.2 R211.2 | length 369.9
  Bottom Layer w8: D202.2@2648.62,510.83 2660.43,510.83 2731.3,439.96 2742.39,439.96 2749.27,433.07 2751.97,433.07 ; C206.1@2795.28,433.07 2751.97,433.07 ; R211.2@2842.52,357.28 2746.06,357.28 2726.38,376.97 2726.38,407.48 2751.97,433.07
NetC206_2: C206.2 L200.1 U200.27 U200.28 U200.29 U200.30 U200.31 | length 63.4
  Top Layer w8: 2761.81,370.08 2763.78,372.05 v1(2763.78,396.65)
  Bottom Layer w8: v1(2763.78,396.65) 2784.45,396.65 C206.2@2795.28,385.83
NetC213_1: C213.1 R213.2 | length 70.9
  Top Layer w10: C213.1@4216.54,66.93 4232.28,66.93 R213.2@4232.28,122.05
NetC215_1: C215.1 D202.1 U200.24 | length 280.1
  Top Layer w8: v1(2834.65,397.64) 2866.46,429.45 2909.76,429.45 2919.29,438.98 U200.24@2935.04,438.98
  Bottom Layer w8: D202.1@2782.48,510.83 2795.28,510.83 2824.8,481.3 2824.8,467.52 2854.33,437.99 C215.1@2859.25,437.99 ; v1(2834.65,397.64) 2834.65,417.32 C215.1@2854.33,437.01
NetC220_1: C220.1 R219.1 | length 61
  Top Layer w8: C220.1@3314.96,476.38 3338.58,452.76 R219.1@3338.58,425.2
NetC224_1: C224.1 U200.14 | length 92.7
  Top Layer w8: C224.1@2980.31,661.42 2996.38,645.35 2996.38,638.76 3023.62,611.51 U200.14@3023.62,586.61
NetC225_1: C225.1 R224.2 | length 91.4
  Top Layer w8: R224.2@3362.2,523.62 3362.2,531.5 C225.1@3421.26,590.55
NetC300_1: C300.1 C301.2 | length 51.2
  Top Layer w10: C300.1@948.82,1104.33 C301.2@1000,1104.33
NetC300_2: C300.2 F300.2 Q302.1 Q302.2 Q302.3 R300.2 R303.1 | length 542.5
  Top Layer w100: Q302.2@885.83,999.41 877.07,1008.17 877.07,1139.34 910.96,1173.23 960.63,1173.23 1165.35,1377.95 R300.2@1177.17,1377.95
NetC302_1: C302.1 C305.2 | length 51.2
  Top Layer w10: C302.1@1657.48,984.25 C305.2@1657.48,1035.43
NetC303_1: C303.1 D300.3 U301.43 | length 3268.3
  Top Layer w10: U301.43@1259.84,422.24 1261.16,423.56 1261.16,464.9 1277.56,481.3
  Top Layer w20: v1(571.85,226.38) 535.43,262.8 393.7,262.8 276.57,379.92 276.57,927.17 350.39,1000.98 536.42,1000.98 615.65,1080.22 712.11,1080.22 v1(755.91,1124.02) ; D300.3@974.41,1411.42 v1(1007.87,1377.95) C303.1@1007.87,1342.52 ; 1277.56,481.3 1293.31,481.3 1380.91,393.7 1380.91,334.01 1389.76,325.16 v1(1389.76,318.9)
  Bottom Layer w20: v1(571.85,226.38) 682.09,226.38 741.14,167.32 938.98,167.32 1001.58,104.72 1261.21,104.72 1389.76,233.27 v1(1389.76,318.9) ; v1(755.91,1124.02) 798.23,1166.34 915.35,1166.34 1007.87,1258.86 v1(1007.87,1377.95)
NetC310_1: C310.1 R309.2 U300.2 | length 567
  Top Layer w18: 810.88,1248.17 813.98,1251.26 U300.2@813.98,1285.43 ; R309.2@840.55,1545.28 v1(879.92,1545.28)
  Top Layer w20: v1(767.72,1212.6) 775.31,1212.6 810.88,1248.17
  Bottom Layer w20: v1(767.72,1212.6) 814.96,1259.84 C310.1@814.96,1346.46 791.34,1346.46 771.65,1366.14 771.65,1440.94 875.98,1545.28 v1(879.92,1545.28)
NetC320_1: C320.1 U301.10 | length 107.3
  Top Layer w10: U301.10@1102.36,640.75 1102.36,684.06 C320.1@1147.64,729.33
NetC322_1: C322.1 U301.33 | length 111.8
  Top Layer w10: U301.33@1062.99,422.24 1062.99,366.14 C322.1@1102.36,326.77
NetD200_2: D200.2 D201.2 R207.1 | length 155.2
  Top Layer w10: R207.1@2866.14,251.97 2866.14,102.36 D200.2@2870.08,98.43
NetD301_1: D301.1 Q301.1 Q301.2 Q301.3 Q302.5 Q302.6 Q302.7 Q302.8 Q303.5 Q303.6 Q303.7 Q303.8 R301.2 | length 161.7
  Top Layer w10: R301.2@1102.36,1165.35 1102.95,1165.94 Q301.3@1181.1,1165.94 ; 1299.21,889.76 1332.68,856.3 D301.1@1332.68,820.87
NetJ100_17: J100.17 R103.2 | length 293.5
  Top Layer w6: J100.17@1026.57,199.8 1026.57,228.78 1087.55,289.76 1107.44,289.76 1134.89,262.31 1219,262.31 R103.2@1244.09,287.4
NetJ100_18: J100.18 R102.2 | length 367.6
  Top Layer w6: J100.18@976.57,199.8 976.57,229.53 1009.84,262.8 1043.24,262.8 1082.21,301.76 1112.41,301.76 1139.86,274.31 1187.69,274.31 1226.38,312.99 1226.38,319.88 1241.14,334.65 R102.2@1244.09,334.65
NetJ100_20: J100.20 R101.2 | length 1318.9
  Top Layer w6: J100.20@876.57,199.8 876.57,121.46 v1(876.97,121.06) ; R101.2@1535.43,559.06 1553.15,541.34 1553.15,526.57 1660.43,419.29 v1(1660.43,337.6)
  Bottom Layer w6: v1(876.97,121.06) 913.39,84.65 1515.75,84.65 1627.95,196.85 1627.95,305.12 v1(1660.43,337.6)